# Altium PCB Oscilloscope.PcbDoc
Units mil, origin at the board's own origin, x right, y up, seen from the top; angles counter-clockwise.
Board outline 3550 x 3300 mil, 2 copper layers (Top Layer, Bottom Layer); 102 components, 111 nets, 421 pads, 62 vias.
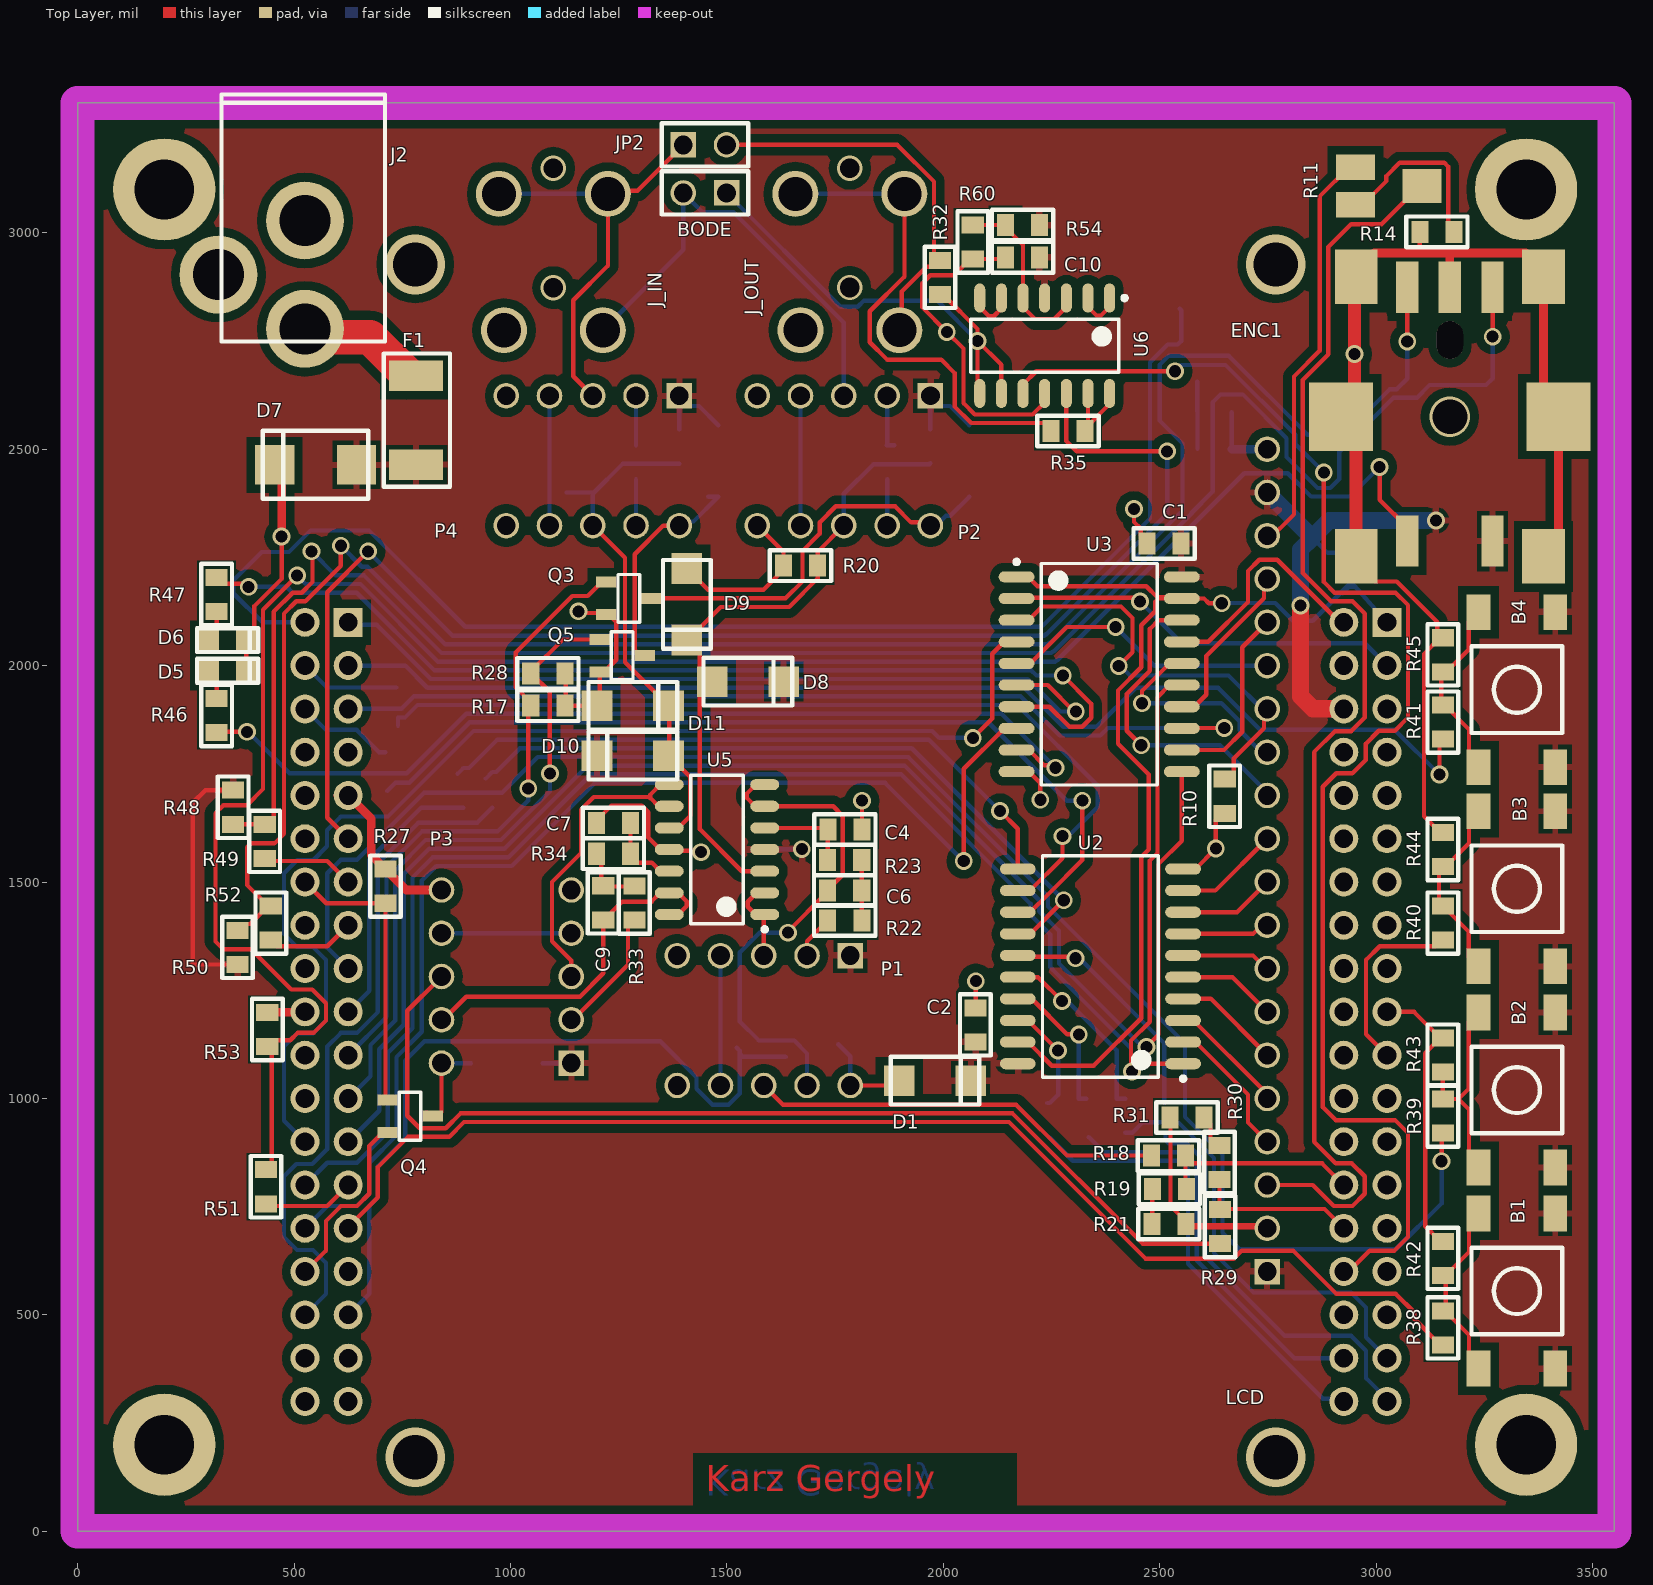
[diagram p0: Top Layer view]
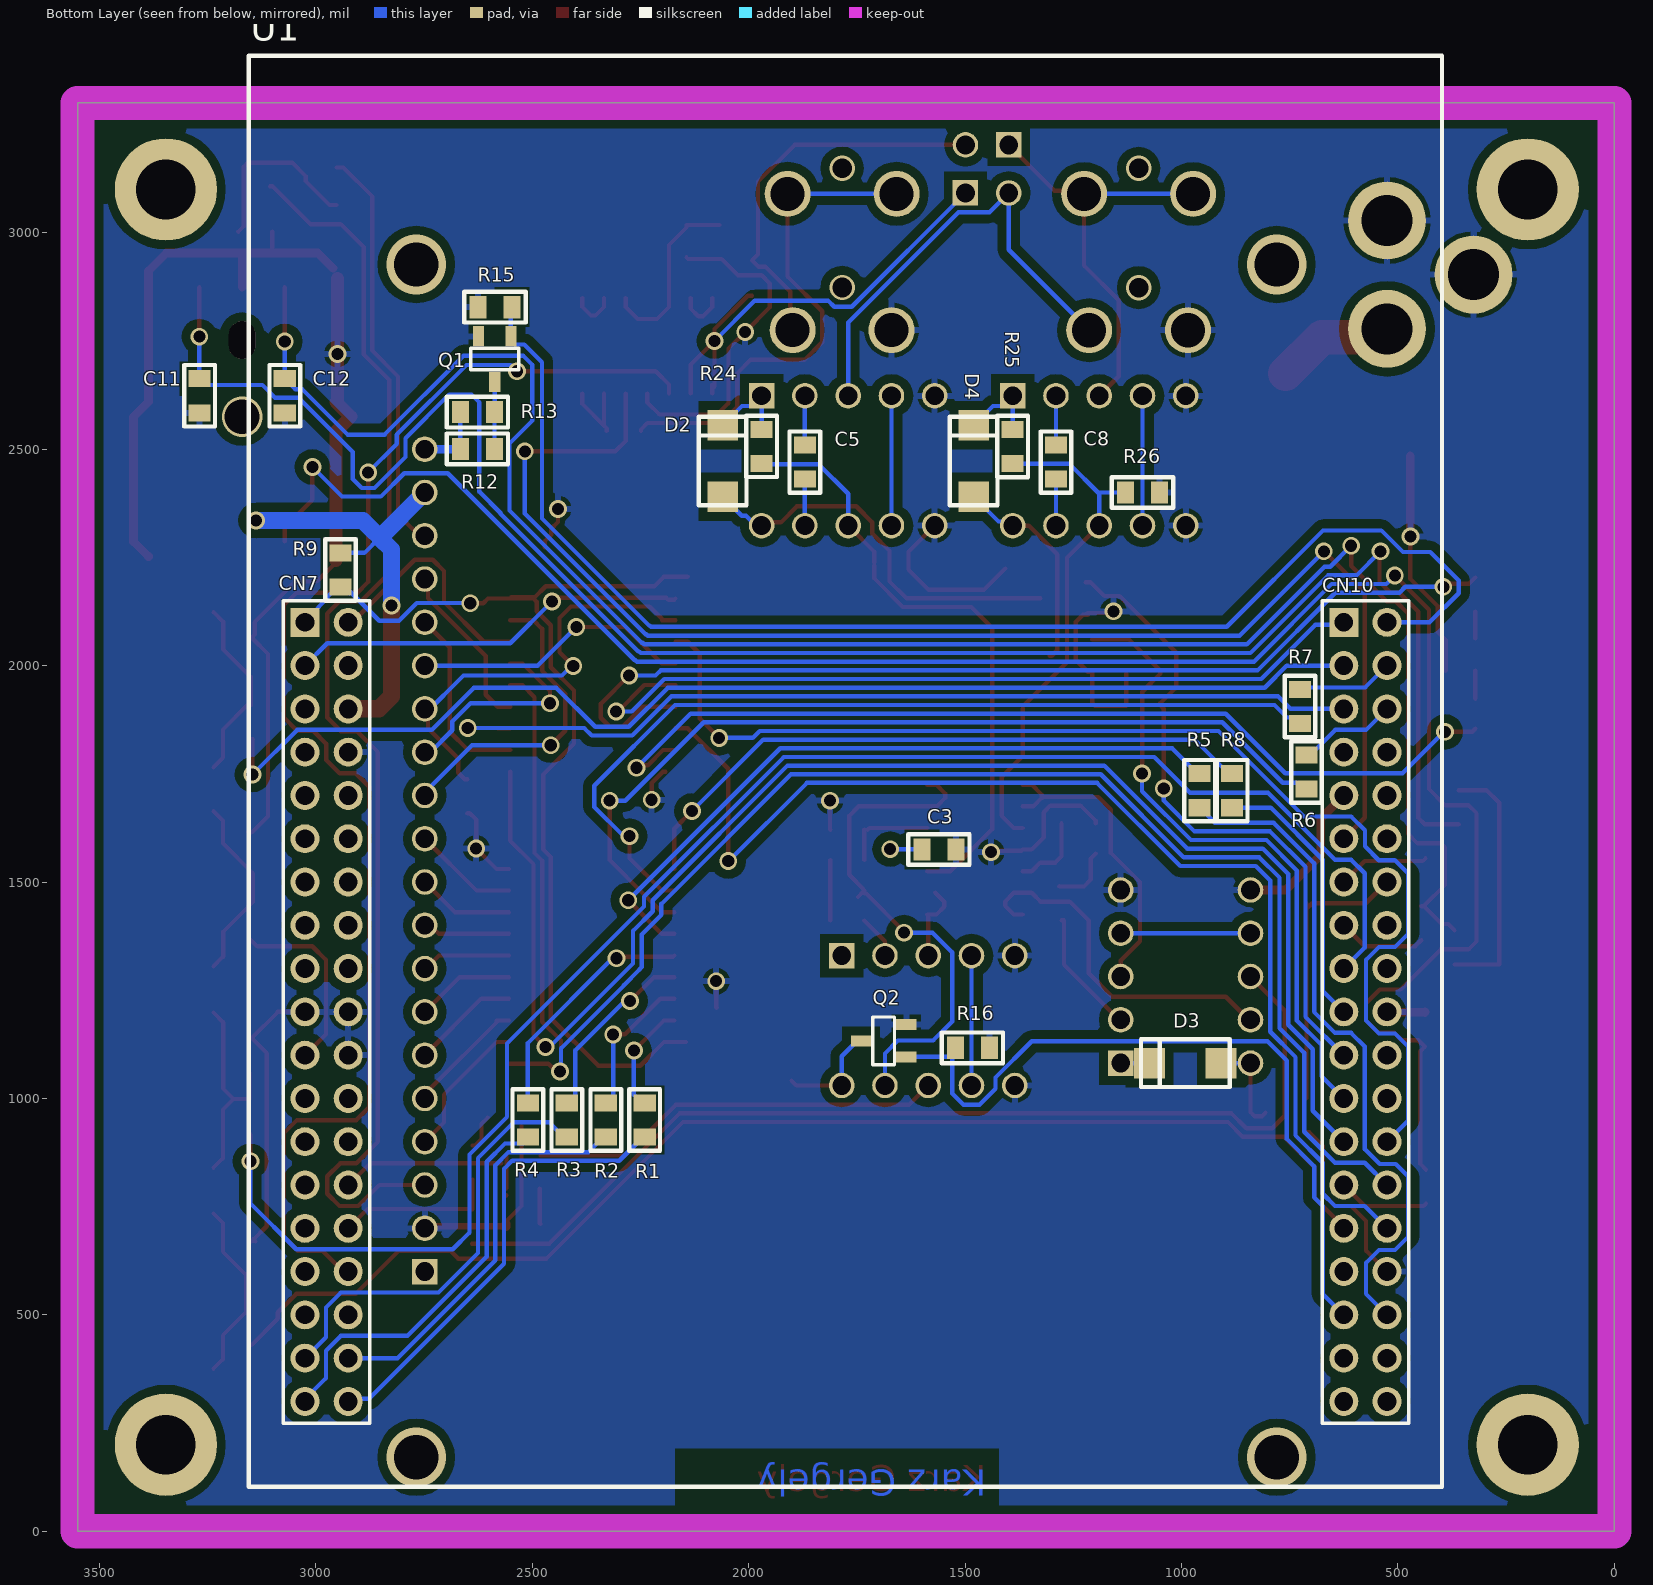
[diagram p1: Bottom Layer view, seen from below]
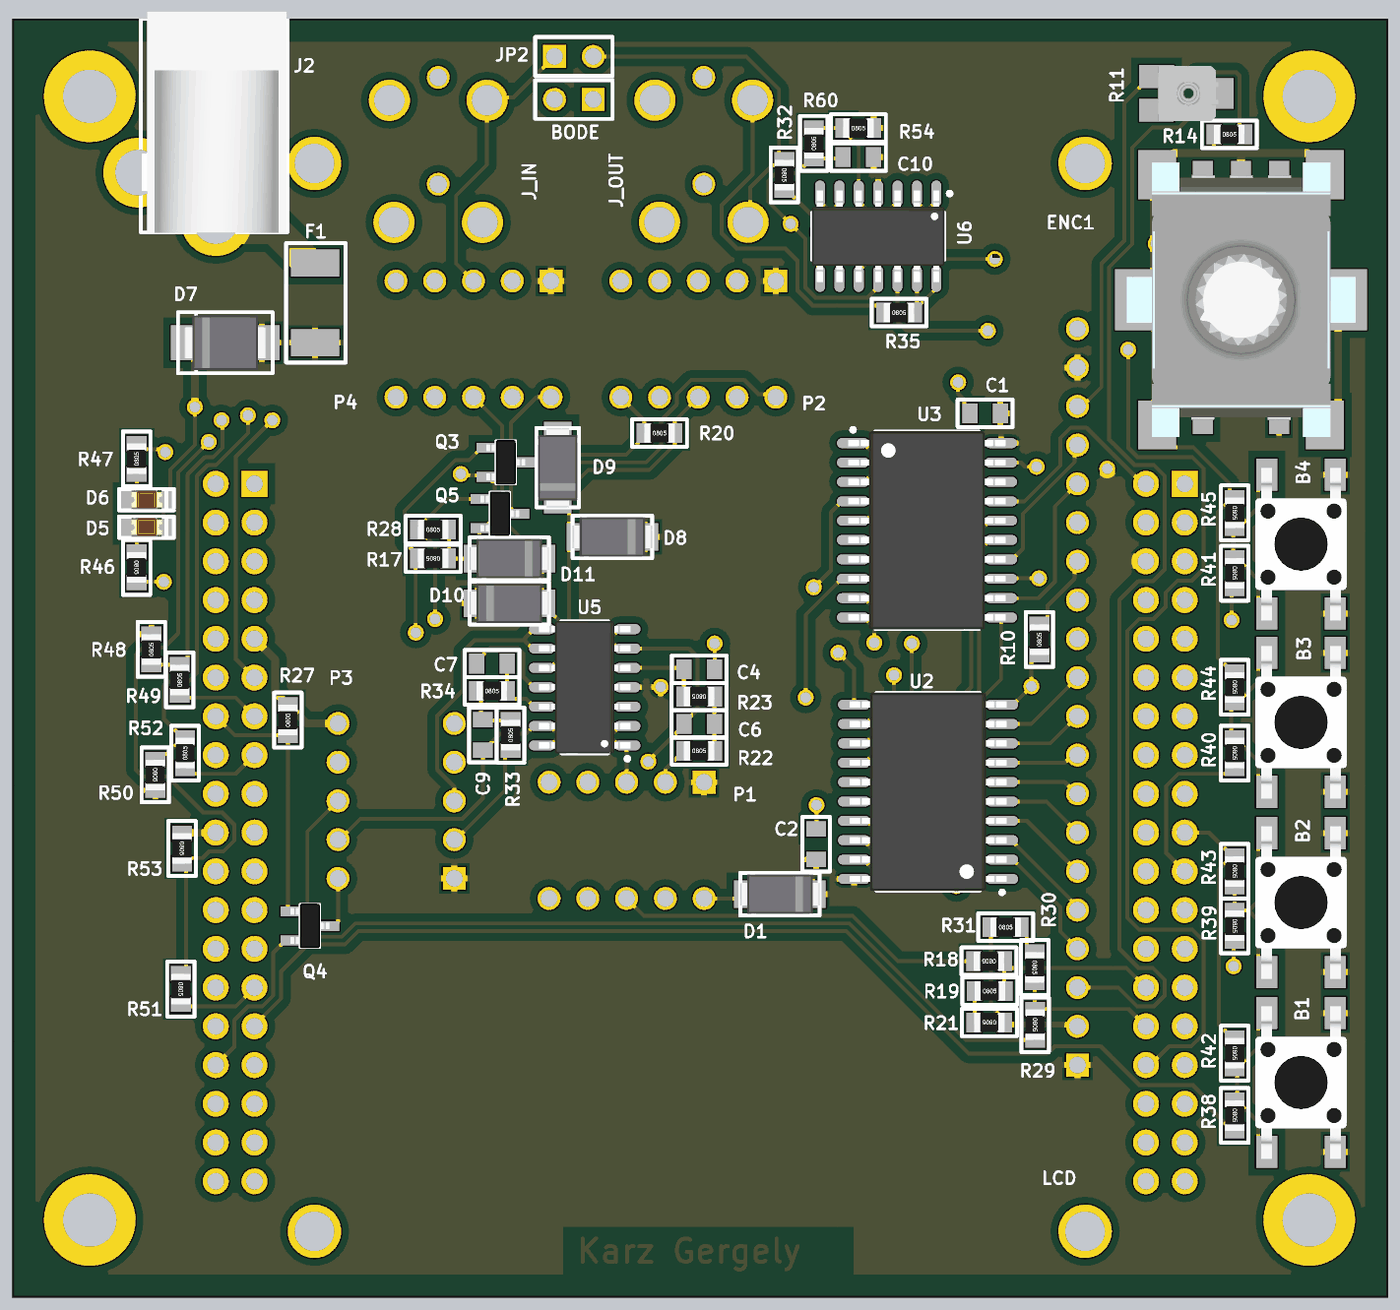
[diagram p2: 3D render of the assembled board from above, using the file's embedded part models]
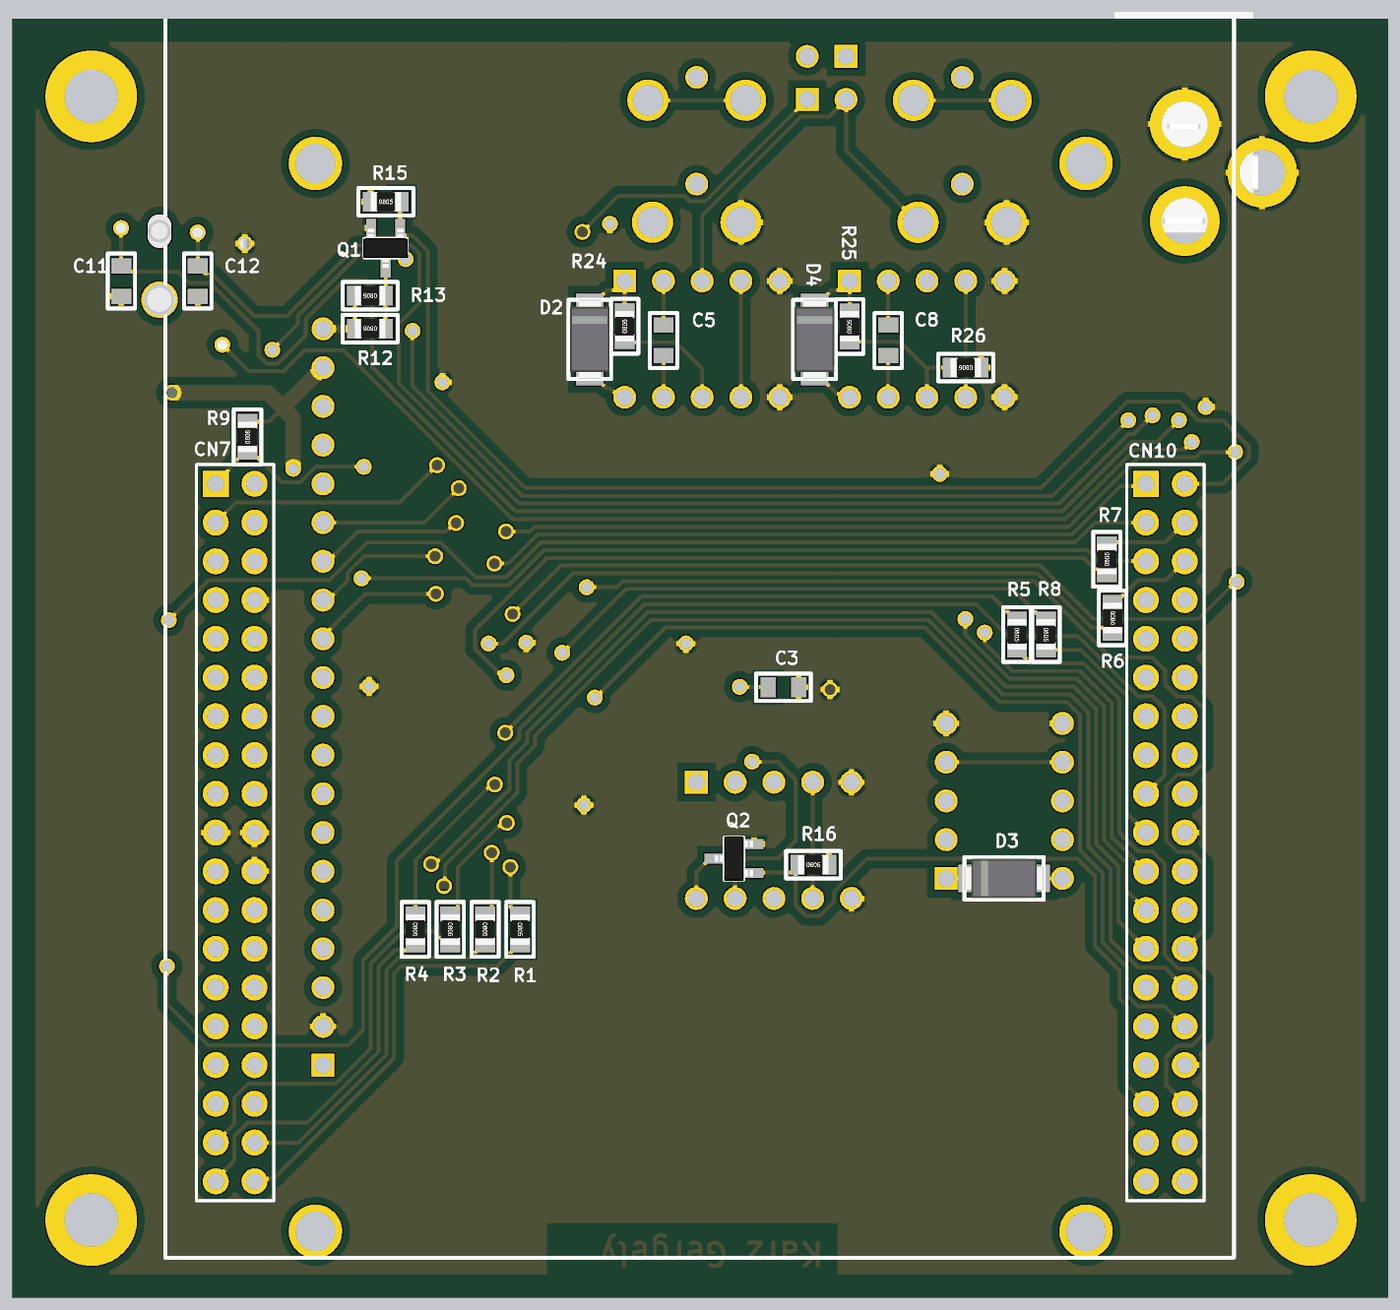
[diagram p3: 3D render of the assembled board from below, using the file's embedded part models]

## Layer stack, top to bottom
Top Solder: solder mask 0.4, Solder Resist, Dk 3.5
Top Layer: signal copper 1.4
Dielectric 1: dielectric 12.6, FR-4, Dk 4.8
Bottom Layer: signal copper 1.4
Bottom Solder: solder mask 0.4, Solder Resist, Dk 3.5

## Board outline
0,0 3550,0 3550,3300 0,3300

## Design rules (kind name [scope] priority, off if disabled: settings)
Clearance [All] p1: gap=20 ignorepadtopadclearanceinfootprint=FALSE except(0: Arc-Hole Track-Hole SMDPad-Hole THPad-Hole Via-Hole Fill-Hole Poly-Hole Region-Hole Text-Hole; 10: Arc-Arc Arc-Track Arc-SMDPad Arc-THPad Arc-Via Arc-Text Track-Track Track-SMDPad Track-THPad Track-Via Track-Text SMDPad-SMDPad SMDPad-THPad SMDPad-Via SMDPad-Text THPad-THPad THPad-Via THPad-Text Via-Via Via-Text Text-Text)
HoleSize [All] p1: absolutevalues=TRUE maxlimit=140 minlimit=28 maxpercent=80.000 minpercent=20.000
MinimumAnnularRing [IsVia] p1: minimumring=6.5
PlaneConnect [All] p1: planeconnectstyle=Relief reliefexpansion=20 reliefentries=4 reliefconductorwidth=20 reliefairgap=10
PolygonConnect [All] p1: connectstyle=Relief reliefconductorwidth=15 reliefentries=4 polygonreliefangle="90 Angle" airgapwidth=10
RoutingVias [All] p1: holewidth=28 width=41 viastyle="Through Hole" minholewidth=28 minwidth=41 maxholewidth=28 maxwidth=41
SolderMaskExpansion [All] p1: expansion=4
Width [All] p1: maxlimit=80 minlimit=10 preferedwidth=10 minimp=50.000000 maximp=50.000000 favimp=50.000000
28 further rules are at their usual default settings.

## Classes and differential pairs
net class LDB[0..7]: LDB0 LDB1 LDB2 LDB3 LDB4 LDB5 LDB6 LDB7
component class OutputStage: BODE C10 J_OUT JP2 R32 R35 R54 R60 U6
component class IO: B1 B2 B3 B4 C11 C12 D5 D6 ENC1 R38 R39 R40 R41 R42 R43 R44 R45 R46 R47 R48 R49 R50 R51 R52 R53
component class InputStage: C3 C4 C5 C6 C7 C8 C9 D1 D2 D3 D4 D8 D9 D10 D11 J_IN P1 P2 P3 P4 Q2 Q3 Q4 Q5 R16 R17 R18 R19 R20 R21 R22 R23 R24 R25 R26 R27 R28 R29 R30 R31 R33 R34 U5
component class GLCD: C1 C2 LCD Q1 R1 R2 R3 R4 R5 R6 R7 R8 R9 R10 R11 R12 R13 R14 R15 U2 U3
component class Nucleo: D7 F1 J2 U1

## Components (designator, comment, footprint, x,y, rotation, side; value= is the part's Value field where it differs from the comment)
B1 "Button" FP_BTN_SMD 3325,555 r180 top
B2 "Button" FP_BTN_SMD 3325,1019.37 r180 top
B3 "Button" FP_BTN_SMD 3325,1484.37 r180 top
B4 "Button" FP_BTN_SMD 3325,1944.37 r180 top
BODE "JUMPER" FP_CONN2_TUSKE_254MM 1499,3092 r90 top (schematic designator JP1)
C1 "100nF" FP_0805_CAP_085 2510,2282 r0 top
C2 "100nF" FP_0805_CAP_085 2073.85,1170 r270 top
C3 "100nF" FP_0805_CAP_085 1560.37,1575 r0 bottom
C4 "10nF" FP_0805_CAP_085 1772.37,1621 r180 top
C5 "10nF" FP_0805_CAP_085 1870,2470 r270 bottom
C6 "10nF" FP_0805_CAP_085 1772,1480.24 r180 top
C7 "10nF" FP_0805_CAP_085 1237.63,1636 r0 top
C8 "10nF" FP_0805_CAP_085 1290,2470 r270 bottom
C9 "10nF" FP_0805_CAP_085 1214,1452 r270 top
C10 "100nF" FP_0805_CAP_085 2183,2943.09 r0 top
C11 "10nF" FP_0805_CAP_085 3268.43,2623.43 r90 bottom
C12 "10nF" FP_0805_CAP_085 3071.57,2623.43 r90 bottom
D1 "SCHOTTKY SMA" FP_SMA 1898,1041 r0 top
D2 "SCHOTTKY SMA" FP_SMA 2060,2390 r90 bottom
D3 "SCHOTTKY SMA" FP_SMA 908.47,1081.68 r0 bottom
D4 "SCHOTTKY SMA" FP_SMA 1480,2390 r90 bottom
D5 "LED Green" FP_0805_LED_RED 306.94,1988 r0 top
D6 "LED Red" FP_0805_LED_RED 306.94,2059 r0 top
D7 "TRANS SUPPR" FP_SMB 549.51,2464 r180 top
D8 "SCHOTTKY SMA" FP_SMA 1465.65,1963 r0 top
D9 "SCHOTTKY SMA" FP_SMA 1407.29,2224.35 r270 top
D10 "SCHOTTKY SMA" FP_SMA 1365.08,1792.02 r180 top
D11 "SCHOTTKY SMA" FP_SMA 1199.72,1907.02 r0 top
ENC1 "Rotary Encoder" FP_PEC11S 3170,2575 r180 top locked
F1 "Multifuse" FP_MULTIFUSE 781.5,2670 r270 top
J2 "2.xmm" FP_DC_TAP_ANYA 525,2778.15 r0 top locked
J_IN "35mm Audio Jack 3 contact" FP_35MM_JACK_SMALL_3PIN 1099.02,3326 r270 top
J_OUT "35mm Audio Jack 3 contact" FP_35MM_JACK_SMALL_3PIN 1784.02,3326.22 r270 top locked
JP2 "JUMPER" FP_CONN2_TUSKE_254MM 1399,3203 r270 top
LCD "GLCD_64128Q" FP_GLCD_64128Q 760,72.44 r90 top locked (schematic designator U4)
P1 "Relay" FP_RELAY 1785,1330 r180 top
P2 "Relay" FP_RELAY 1970,2623.43 r180 top
P3 "Relay" FP_RELAY 1140.47,1081.68 r90 top
P4 "Relay" FP_RELAY 1390,2623.43 r180 top
Q1 "2N7002" FP_SOT23-3 2586.57,2708.23 r90 bottom
Q2 "2N7002" FP_SOT23-3 1688.01,1133 r180 bottom
Q3 "2N7002" FP_SOT23-3 1273.24,2155.4 r180 top
Q4 "2N7002" FP_SOT23-3 768,959 r180 top
Q5 "2N7002" FP_SOT23-3 1258,2023 r180 top
R1 "1K" FP_0805_RES 2240,950 r270 bottom
R2 "1K" FP_0805_RES 2330,950 r270 bottom
R3 "1K" FP_0805_RES 2420,950 r270 bottom
R4 "1K" FP_0805_RES 2510,950 r270 bottom
R5 "1K" FP_0805_RES 957.91,1711 r270 bottom
R6 "1K" FP_0805_RES 711,1754 r90 bottom
R7 "1K" FP_0805_RES 726,1905.32 r90 bottom
R8 "1K" FP_0805_RES 883,1711 r270 bottom
R9 "100K" FP_0805_RES 2943,2221 r90 bottom
R10 "10K" FP_0805_RES 2650,1698.19 r90 top
R11 "4K7" FP_CERMET_SMD 2968,3147 r270 top
R12 "100R" FP_0805_RES 2626.63,2500.63 r0 bottom
R13 "100R" FP_0805_RES 2626.63,2585.63 r0 bottom
R14 "6K8" FP_0805_RES 3140,3002 r0 top
R15 "10K" FP_0805_RES 2586,2828 r180 bottom
R16 "10K" FP_0805_RES 1483,1117 r180 bottom
R17 "10K" FP_0805_RES 1086,1907.63 r180 top
R18 "1K" FP_0805_RES 2520,868 r180 top
R19 "1K" FP_0805_RES 2522,791.03 r0 top
R20 "2M00" FP_0805_RES 1669.84,2231 r0 top
R21 "1K" FP_0805_RES 2521,710 r180 top
R22 "470R" FP_0805_RES 1772.13,1411 r0 top
R23 "470R" FP_0805_RES 1772,1551 r180 top
R24 "2M00" FP_0805_RES 1970,2506.63 r90 bottom
R25 "2M00" FP_0805_RES 1390,2506 r90 bottom
R26 "2M00" FP_0805_RES 1090,2400 r0 bottom
R27 "10K" FP_0805_RES 711,1490.37 r90 top
R28 "10K" FP_0805_RES 1086,1982 r0 top
R29 "1K" FP_0805_RES 2638.95,704 r270 top
R30 "1K" FP_0805_RES 2638,852 r270 top
R31 "1K" FP_0805_RES 2563,956 r0 top
R32 "47R" FP_0805_RES 1992,2897 r270 top
R33 "470R" FP_0805_RES 1286,1451.54 r90 top
R34 "470R" FP_0805_RES 1237.63,1565.46 r0 top
R35 "47R" FP_0805_RES 2288,2542 r0 top
R38 "1K" FP_0805_RES 3154,470 r270 top
R39 "1K" FP_0805_RES 3154,959.37 r270 top
R40 "1K" FP_0805_RES 3154,1405 r270 top
R41 "1K" FP_0805_RES 3154,1869.37 r270 top
R42 "10K" FP_0805_RES 3154,630.63 r270 top
R43 "10K" FP_0805_RES 3154,1100 r270 top
R44 "10K" FP_0805_RES 3154,1575 r270 top
R45 "10K" FP_0805_RES 3154,2025 r270 top
R46 "150R" FP_0805_RES 321,1884.37 r270 top
R47 "150R" FP_0805_RES 321,2164.37 r90 top
R48 "10K" FP_0805_RES 359,1672.74 r90 top
R49 "10K" FP_0805_RES 432,1594 r90 top
R50 "10K" FP_0805_RES 369,1349 r270 top
R51 "1K" FP_0805_RES 435,796 r270 top
R52 "10K" FP_0805_RES 446,1405 r90 top
R53 "10K" FP_0805_RES 438,1159.13 r270 top
R54 "10K" FP_0805_RES 2183,3018.09 r0 top
R60 "10K" FP_0805_RES 2068,2978.68 r90 top
U1 "NUCLEO-F446RE" FP_NUCLEO-64 3025,2100 r180 bottom locked
U2 "74HCT245" FP_SOP127P1030X265-20M 2362.76,1305.24 r180 top
U3 "74HCT244D" FP_SOP127P1030X265-20M 2360,1980 r0 top
U5 "TLV3544IDR" FP_SOIC127P600X175-14M 1477,1575 r180 top
U6 "TLV3544IDR" FP_SOIC127P600X175-14M 2234,2739 r270 top

## Footprints (in the part's own frame and the unit in brackets; to place one, negate y for a bottom-side part, rotate by r counter-clockwise, add the part's x,y. Pads: shape width x height; smd on the part's side, far side on the other; paste and mask are expansions set on the pad)
FP_35MM_JACK_SMALL_3PIN [mm] "MX-387GL -  Phone Audio Connector, 3 Contacts, Jack, 3.5 mm, PCB Mount, Metal Body"
  round 2.7 hole 2: 1(14,2.9) 2(6,3.2) 2(6,-3.2) 3(14,-2.9)
  body extent 0,-3.7 19.2,8.5, height 6
FP_0805_CAP_085 [mm] "0805 kapacitás YAGEO 0.85mm magas"
  rect 1x1.3 smd: 1(-1,0) 2(1,0)
  silkscreen extent -1.8,-0.9 1.8,0.9, body extent -1,-0.64 1.03,0.64, height 0.85
FP_0805_LED_RED [mm] "0805 méretû piros LED"
  rect 1.2x1.3 smd: A(-0.1,0) K(2.1,0)
  silkscreen extent -0.8,-0.7 2.8,0.7, body extent 0.01,-0.63 2.03,0.62, height 1.1
FP_0805_RES [mm] "0805 ellenállás"
  rect 1x1.3 smd: 1(-1,0) 2(1,0)
  silkscreen extent -1.8,-0.9 1.8,0.9, body extent -1,-0.62 1,0.63, height 0.62
FP_BTN_SMD [mm] "SMD Push Button 6x6mm"
  rect 1.4x2.1 smd: 1(2.25,4.55) 2(2.25,-4.55) 3(-2.25,4.55) 4(-2.25,-4.55)
  silkscreen extent -2.67,-2.54 2.67,2.54, body extent -3,-5 3,5, height 5.1
FP_CERMET_SMD [mm] "SMD Cermet Pot 3x3.8mm"
  rect 1.5x2.3 smd: 1(-0.1,-0.4) 3(2.1,-0.4)
  rect 2x2.3 smd: 2(1,3.5)
  body extent -0.8,-0.32 2.8,3.64, height 1.13
FP_CONN2_TUSKE_254MM [mm] "2×1 tüskesor"
  rect 1.5x1.5 hole 1.1: 1(0,0)
  round 1.5 hole 1.1: 2(0,2.54)
  silkscreen extent -1.27,-1.27 1.27,3.81, body extent -1.27,-1.27 1.27,3.81, height 8.54
FP_DC_TAP_ANYA [mil] "DC HEBA25 TÁPFESZÜLTSÉG ALJZAT ZÁRT, NYÁKBA 90°"
  round 180 hole 118: 1(0,0) 2(0,250) 3(-200,125)
  silkscreen extent -193,-30 185,541, body extent -190,-31 183,539, height 440
FP_GLCD_64128Q [mm] "64128Q"
  rect 1.5x1.5 hole 1.1: 1(13.4,-50.5)
  round 1.5 hole 1.1: 2(15.94,-50.5) 3(18.48,-50.5) 4(21.02,-50.5) 5(23.56,-50.5) 6(26.1,-50.5) 7(28.64,-50.5) 8(31.18,-50.5) 9(33.72,-50.5) 10(36.26,-50.5) 11(38.8,-50.5) 12(41.34,-50.5) 13(43.88,-50.5) 14(46.42,-50.5) 15(48.96,-50.5) 16(51.5,-50.5) 17(54.04,-50.5) 18(56.58,-50.5) 19(59.12,-50.5) 20(61.66,-50.5)
  body extent 0,-53 75,0.75, height 16.3
FP_MULTIFUSE [mm] "POLYFUSE SMD 1812"
  rect 1.78x3.15 smd: 1(0,0) 2(5.23,0)
  silkscreen extent -1.3,-1.9 6.53,2, body extent 0.3,-1.64 5,1.79, height 1
FP_NUCLEO-64 [mm]
  rect 1.7x1.7 hole 1.1: 1(0,0) 39(60.96,0)
  round 1.7 hole 1.1: 2(2.54,0) 3(0,-2.54) 4(2.54,-2.54) 5(0,-5.08) 6(2.54,-5.08) 7(0,-7.62) 8(2.54,-7.62) 9(0,-10.16) 10(2.54,-10.16) 11(0,-12.7) 12(2.54,-12.7) 13(0,-15.24) 14(2.54,-15.24) 15(0,-17.78) 16(2.54,-17.78) 17(0,-20.32) 18(2.54,-20.32) 19(0,-22.86) 20(2.54,-22.86) 21(0,-25.4) 22(2.54,-25.4) 23(0,-27.94) 24(2.54,-27.94) 25(0,-30.48) 26(2.54,-30.48) 27(0,-33.02) 28(2.54,-33.02) 29(0,-35.56) 30(2.54,-35.56) 31(0,-38.1) 32(2.54,-38.1) 33(0,-40.64) 34(2.54,-40.64) 35(0,-43.18) 36(2.54,-43.18) 37(0,-45.72) 38(2.54,-45.72) 40(63.5,0) 41(60.96,-2.54) 42(63.5,-2.54) 43(60.96,-5.08) 44(63.5,-5.08) 45(60.96,-7.62) 46(63.5,-7.62) 47(60.96,-10.16) 48(63.5,-10.16) 49(60.96,-12.7) 50(63.5,-12.7) 51(60.96,-15.24) 52(63.5,-15.24) 53(60.96,-17.78) 54(63.5,-17.78) 55(60.96,-20.32) 56(63.5,-20.32) 57(60.96,-22.86) 58(63.5,-22.86) 59(60.96,-25.4) 60(63.5,-25.4) 61(60.96,-27.94) 62(63.5,-27.94) 63(60.96,-30.48) 64(63.5,-30.48) 65(60.96,-33.02) 66(63.5,-33.02) 67(60.96,-35.56) 68(63.5,-35.56) 69(60.96,-38.1) 70(63.5,-38.1) 71(60.96,-40.64) 72(63.5,-40.64) 73(60.96,-43.18) 74(63.5,-43.18) 75(60.96,-45.72) 76(63.5,-45.72)
  silkscreen extent -3.3,-50.72 66.72,33.25, body extent -3.3,-50.72 66.72,33.25, height 11
FP_PEC11S [mm] "ENCODER EC11P20 (KEN) ROTARY ENCODER + PUSH BUTTON 20-PULSE L=15mm /EC-11/"
  rect 1.3x3 smd: A(-2.5,-7.6) B(2.5,-7.6) C(0,-7.6) D(-2.5,7.3) E(2.5,7.3)
  rect 3.75x4 smd: GND(-6.375,0) GND(6.375,0)
  rect 2.5x3.2 smd: GND(-5.5,8.2) GND(-5.5,-8.2) GND(5.5,8.2) GND(5.5,-8.2)
  oval 1.55x2.2 hole 2.2 slot 1.55 at 0 deg unplated: ""(0,-4.5)
  body extent -7.52,-9 19.2,9, height 14.4
FP_RELAY [mm] "Low Profile Mini Relay 14x9x5mm"
  rect 1.5x1.5 hole 1.1: 1(0,0)
  round 1.5 hole 1.1: 2(2.54,0) 3(5.08,0) 4(7.62,0) 5(10.16,0) 6(10.16,7.62) 7(7.62,7.62) 8(5.08,7.62) 9(2.54,7.62) 10(0,7.62)
  body extent -1.92,-0.69 12.1,8.3, height 5
FP_SMA [mm] "SMA DO-214AC tok"
  rect 1.8x1.8 smd: 1(0,0) 2(4.2,0)
  silkscreen extent -0.5,-1.4 4.7,1.4, body extent -0.5,-1.3 4.7,1.3, height 2.42
FP_SMB [mm] "DO214-AA tok (SMB)"
  rect 2.3x2.3 smd: 1(-2.4,0) 2(2.4,0)
  silkscreen extent -3.1,-2 3.1,2, body extent -2.7,-1.8 2.7,1.8, height 2.32
FP_SOIC127P600X175-14M [mm] "SOIC, 14-Leads, Body 8.65x3.90mm, Pitch 1.27mm, IPC Low Density"
  oval 1.7x0.65 smd: 1(-2.8,3.81) 2(-2.8,2.54) 3(-2.8,1.27) 4(-2.8,0) 5(-2.8,-1.27) 6(-2.8,-2.54) 7(-2.8,-3.81) 8(2.8,-3.81) 9(2.8,-2.54) 10(2.8,-1.27) 11(2.8,0) 12(2.8,1.27) 13(2.8,2.54) 14(2.8,3.81)
  silkscreen extent -2.93,-4.35 1.55,4.81, body extent -3,-4.35 3,4.35, height 1.75
FP_SOP127P1030X265-20M [mm] "SOP, 20-Leads, Body 12.80x7.50mm, Pitch 1.27mm, IPC Low Density"
  oval 2.1x0.65 smd: 1(-4.85,5.715) 2(-4.85,4.445) 3(-4.85,3.175) 4(-4.85,1.905) 5(-4.85,0.635) 6(-4.85,-0.635) 7(-4.85,-1.905) 8(-4.85,-3.175) 9(-4.85,-4.445) 10(-4.85,-5.715) 11(4.85,-5.715) 12(4.85,-4.445) 13(4.85,-3.175) 14(4.85,-1.905) 15(4.85,-0.635) 16(4.85,0.635) 17(4.85,1.905) 18(4.85,3.175) 19(4.85,4.445) 20(4.85,5.715)
  silkscreen extent -4.98,-6.5 3.4,6.71, body extent -5.15,-6.5 5.15,6.5, height 2.65
FP_SOT23-3 [mm] "SOT23-3 tok"
  rect 1.2x0.65 smd: 1(1.327,-0.95) 2(1.327,0.95) 3(-1.327,0)
  silkscreen extent -0.64,-1.4 0.64,1.4, body extent -1.27,-1.46 1.27,1.46, height 0.97

## Part data
B1 B2 B3 B4: "Push button", Name="TACT 6x 6 4P SPST 1 FSM2JSMA (TYC) 50mA 12VDC SMD H=4.3mm 160g BLACK B. 2-1437565-7", Reference=45-05-42, Supplier=Lomex
BODE JP2: "Jumper Wire"
C1 C2 C3 C10: library part "CAP 100nF", "Capacitor", Tolerance=10%, Voltage=50V, Name="100nF 0805 10% 50V X7R 0805B104K500CT (WAL)", Reference=82-10-76, Supplier=Lomex
C4 C5 C6 C7 C8 C9 C11 C12: library part "CAP 10nF", "Capacitor", Tolerance=10%, Voltage=100V, Name="10nF 0805 10% 100V X7R 08051C103KAT2A (AVX)", Reference=82-11-02, Supplier=Lomex
D1 D2 D3 D4 D8 D9 D10 D11: "Schottky diode", Current=1A, Voltage=40V, Name="1A 40V DO-214AC SCH.RECT.LOW Vf SSL14 (TSC) SMA", Reference=83-02-20, Supplier=Lomex
D5: "Green LED", I_max=25mA, Name="2012 GREEN 568nm 15mcd KP-2012SGC (KIN) W.CLEAR 2x1.2x1.1mm 0805 120°", Reference=95-01-09, Supplier=Lomex, U_fw=2.2V, Wavelength=568nm
D6: "Red LED", I_max=30mA, Name="2012 RED 640nm 100mcd KP-2012SRC-PRV (KIN) W.CLEAR 2x1.2x1.1mm 0805 120°", Reference=95-01-68, Supplier=Lomex, U_fw=1.85V, Wavelength=640nm
D7: "Transient suppressor", Voltage=6.7V, Name="6.7V Ubr 600W UNIDIR. 5V Urwm SMBJ5.0A (STM) DO-214AA (SMB) ½BUZ½", Reference=96-03-67, Supplier=Lomex
ENC1: library part PEC11S-929K, "Encoders 9.5 MM SHAFT W/SWITCH 2 DET", Name=PEC11S-929K-H0015
F1: "1812 Multifuse", Name="1.25A 15V 1812L125/16DR POLYFUSE SMD 1812 (LFS) ½LF125-16½", Reference=44-04-71, Supplier=Lomex
J2: library part DC_TAP_ANYA, "2.xmm DC HEBA25 TÁPFESZÜLTSÉG ALJZAT ZÁRT, NYÁKBA 90°", Name="TÁP DC ANYA 5.5/2.1/9.5mm DCS-5521-5", Reference=43-07-67, Supplier=Lomex
J_IN J_OUT: "3.5mm Audio Jack MX-387GL", Name="MX-387GL -  Phone Audio Connector, 3 Contacts, Jack, 3.5 mm, PCB Mount, Metal Body", Reference=1267376, Supplier=Farnell
LCD: "64128QCCBW-3LP", Name="128x 64 DOT LIGHT:LED 64128QCCBW-3LP (DIS) 0.4/DOT 75x53mm BLUE STN LOW.POW. WIDE TEMP. (CONTROLLER/DRIVER: SBN6400G-D + SBN0064G-D)", Reference=37-00-71, Supplier=Lomex
P1 P2 P3 P4: library part "Relay Mini DPDT", "Mini DPDT relay 14x9x5mm", Name="MECH 5V 2xMORSE 1A/30VDC 0.5A/12VAC A5W-K (TAK) 178R 14x9x5mm", Reference=42-17-08, Supplier=Lomex
Q1 Q2 Q3 Q4 Q5: "N-channel MOSFET", Current=300mA, Voltage=60V, Name="MOSFET Transistor, N Channel, 300mA, 60V, 2.8 ohm, 10V, 2V", Reference=86-05-52, Supplier=Lomex
R1 R2 R3 R4 R5 R6 R7 R8 R18 R19 R21 R29 R30 R31 R38 R39 R40 R41 R51: library part "RES 1K", "Resistor", Power=125mW, Tolerance=5%, Name="1K00 0805 5% WR08X102JTL 0.125W (WAL)", Reference=81-27-93, Supplier=Lomex
R9: library part "RES 100K", "Resistor", Power=125mW, Tolerance=5%, Name="100K 0805 5% WR08X104JTL 0.125W (WAL)", Reference=81-30-68, Supplier=Lomex
R10 R15 R16 R17 R27 R28 R42 R43 R44 R45 R48 R49 R50 R52 R53 R54 R60: library part "RES 10K", "Resistor", Power=125mW, Tolerance=5%, Name="10K0 0805 5% CR-05JL7---10K 0.125W (VIK)", Reference=81-30-45, Supplier=Lomex
R11: library part "Cermet Pot 4K7", "4K70 3305-472R (KIC) 3x3.8mm CERMET", Name="4K70 3305-472R (KIC) 3x3.8mm CERMET", Reference=90-00-68, Supplier=Lomex
R12 R13: library part "RES 100R", "Resistor", Power=125mW, Tolerance=5%, Name="100R 0805 5% WR08X101JTL 0.125W (WAL)", Reference=81-30-00, Supplier=Lomex
R14: library part "RES 6K8", "Resistor", Power=125mW, Tolerance=5%, Name="6K80 0805 5% WR08X682JTL 0.125W (WAL)", Reference=81-30-41, Supplier=Lomex
R20 R24 R25 R26: library part "RES 2M", "Resistor", Power=125mW, Tolerance=1%, Name="2M00 0805 1% CR-05FL7---2M0 0.125W (VIK)", Reference=80-17-98, Supplier=Lomex
R22 R23 R33 R34: library part "RES 470R", "Resistor", Power=125mW, Tolerance=5%, Name="470R 0805 5% CR-05JL7--470R 0.125W (VIK)", Reference=81-10-83, Supplier=Lomex
R32 R35: library part "RES 47R", "Resistor", Power=125mW, Tolerance=5%, Name="47R0 0805 5% WR08X470JTL 0.125W (WAL)", Reference=81-28-06, Supplier=Lomex
R46 R47: library part "RES 150R", "Resistor", Power=125mW, Tolerance=5%, Name="150R 0805 5% CR-05JL7--150R 0.125W (VIK)", Reference=81-10-77, Supplier=Lomex
U2: "8x Bidirectional bus transciever", Name="74HCT245D  Transceiver, 74HCT245", Reference=87-06-35, Supplier=Lomex
U3: "8xBuffer/Line Driver", Name="74HCT244D-Q100,118  Buffer / Line Driver, 74HCT244", Reference=87-05-95, Supplier=Lomex
U5 U6: "Operational Amplifier, RRIO, 4 Amplifier, 200 MHz, 150 V/µs, 2.5V to 5.5V, ± 1.25V to ± 2.75V, SOIC", Name="TLV3544IDR . -  Operational Amplifier", Reference=2851094, Supplier=Farnell
U1: Name="Nucleo F446RE", Reference=NUCLEO, Supplier=Tanszék

## Free pads (board coordinates)
  round 236.22 hole 137.8: ""(200,200) ""(200,3100) ""(3346.26,200) ""(3346.26,3100)

## Via types
v1: diameter 41, hole 28, Top Layer to Bottom Layer, 53 vias
v2: diameter 58.66, hole 45.28, Top Layer to Bottom Layer, 4 vias
v3: diameter 137.8, hole 102.36, Top Layer to Bottom Layer, 4 vias
v4: diameter 94.09, hole 80.71, Top Layer to Bottom Layer, 1 vias

## Nets (pads, with @x,y where several pads share a name; then routed paths per layer and width w, separated by ;. In a path a pad name is that pad's centre, name@x,y a point inside that pad or via, vN(x,y) a via of type N, cw(c..) or ccw(c..) an arc to the next point about the centre after c; other vN are vias at no path point)
+5: B1.3 B1.4 B2.3 B2.4 B3.3 B3.4 B4.3 B4.4 C1.2 C2.2 C3.2 C10.2 D1.2 D2.2 D3.2 D4.2 D7.1 D8.2 D10.2 ENC1.D F1.2 LCD.1 LCD.19 P1.1 P2.1 P3.1 P4.1 R9.2 R24.2 R25.2 R48.2 R50.2 R54.2 U1.6 U2.20 U3.20 U5.4 U6.4 | length 2147.3
  Top Layer w10: R48.2 295.11,1712.11 266,1683 266,1309.63 R50.2
  Top Layer w40: v1(2825,2139) 2825,1929 2854,1900 U1.6
  Bottom Layer w10: D3.2 P3.1 ; R25.2 P4.1 1413.5,2599.93 1435.42,2599.93 D4.2 ; C3.2 1600.74,1574 1602.74,1576 v1(1673,1576) ; R24.2 P2.1 1993.5,2599.93 2015.42,2599.93 D2.2 ; 2852.33,2295.67 2887.63,2260.37 R9.2
  Bottom Layer w20: LCD.19@2747.69,2400.5 LCD.19
  Bottom Layer w40: LCD.19@2747,2401 2852.33,2295.67 2825,2268.34 v1(2825,2139) ; 2862.14,2306.3 2891.17,2335.32 v1(3138,2335.32)
A_IN1: R18.1 R19.2 U1.28 | length 454.1
  Top Layer w10: R18.1 2559.37,793.03 R19.2 ; R19.2@2559.74,776.63 R19.2@2561.37,775 ; R18.1@2571.74,850 2875,850 U1.28
A_IN2: R29.1 R30.2 U1.30 | length 374.6
  Top Layer w10: R30.2 2638,744.32 R29.1 2640.11,744.53 2880.47,744.53 U1.30
BTN_1: R38.2 U1.67 | length 2915.3
  Top Layer w10: U1.67 621.82,700 693.46,771.64 693.46,841.68 762.99,911.2 858.36,911.2 892.63,945.47 2151.38,945.47 2466.91,629.94 2670.76,629.94 2689.28,648.46 2808,648.46 2908,548.46 3045.07,548.46 3087.71,505.83 3087.71,491.02 3148.09,430.63 R38.2
BTN_2: R39.2 U1.55 | length 3823.6
  Top Layer w10: v1(3151,855) 3151,917 R39.2
  Bottom Layer w10: U1.55 576.54,1348.46 576.54,1478.7 577.15,1479.31 576.54,1479.93 576.54,1520.07 608,1551.54 645.07,1551.54 799.85,1706.32 980.35,1706.32 1063.03,1789 1918.55,1789 2241.5,1466.05 2241.5,1443.5 2558,1127 2558,957.4 2645,870.4 2645,690 2683.46,651.54 3045.07,651.54 3151,757.46 v1(3151,855)
BTN_3: R40.2 U1.21 | length 438.3
  Top Layer w10: U1.21 2976.54,1148.46 2976.54,1320.07 3008,1351.54 3135.54,1351.54 R40.2@3154,1370
BTN_4: R41.2 U1.41 | length 2787.1
  Top Layer w10: v1(3146,1748.18) 3146,1829 3145,1830 R41.2@3150,1830
  Bottom Layer w10: U1.41 756.57,2000 807.57,1949 2186.56,1949 2277.06,1858.5 2354.3,1858.5 2444.3,1948.5 2634.99,1948.5 2731.95,1851.54 3042.64,1851.54 v1(3146,1748.18)
BTN_MAIN: R51.2 U1.65 | length 212.2
  Top Layer w10: R51.2 440.09,751.54 576.54,751.54 U1.65
DAC_OUT1: U1.32 U6.10 | length 3247.5
  Top Layer w10: U6.10 2184,2649.43 2214.57,2680 v1(2535,2680) ; v1(2879,2446) 2879,2193.21 2903.75,2168.46 3044.68,2168.46 3073.46,2139.68 3073.46,1879.93 3043.06,1849.52 3005.98,1849.52 2975.57,1819.11 2975.57,1782.03 2944.88,1751.34 2907.8,1751.34 2876.54,1720.07 2876.54,979.93 2906.46,950 3043.54,950 3073.46,920.07 3073.46,679.93 3042,648.46 2985.07,648.46 2936.61,600 U1.32
  Bottom Layer w10: v1(2535,2680) 2549.6,2694.6 2651.8,2694.6 2812.72,2533.69 2812.72,2512.28 v1(2879,2446)
DAC_OUT2: U1.49 U6.12 | length 3263.4
  Top Layer w10: U1.49 576.54,1648.46 576.54,2169.54 v1(671,2264) ; U6.12 2284,2518.88 2307.88,2495 v1(2517,2495)
  Bottom Layer w10: v1(671,2264) 866,2069 2232.94,2069 2236.44,2072.5 2238.28,2072.5 2517,2351.22 v1(2517,2495)
GLCD_BACKLIGHT_PWM: Q1.1 R15.2 U1.40 | length 3113
  Bottom Layer w10: U1.40 426.8,2100 359.5,2167.3 359.5,2196.7 425.3,2262.5 488.3,2262.5 538.09,2312.3 672.91,2312.3 895.3,2089.9 2225.56,2089.9 2228.16,2092.5 2230,2092.5 2477.42,2339.92 2477.42,2700.91 2518.36,2741.85 2541.38,2741.85 2549.17,2749.64 Q1.1 2549.17,2821.27 R15.2@2546.22,2824.23
GLCD_CS1: U1.3 U3.2 | length 923.9
  Top Layer w10: U3.2 2172.04,2152.02 2185.52,2152.02 2190,2156.5 2445.5,2156.5 v1(2454,2148)
  Bottom Layer w10: v1(2454,2148) 2550.46,2051.54 2973.46,2051.54 U1.3
GLCD_CS2: U1.64 U3.4 | length 2800.5
  Top Layer w10: v1(2068,1833) 2112.72,1877.72 2112.72,2027.2 2140.51,2055 U3.4
  Bottom Layer w10: U1.64 476.54,948.46 476.54,1120.07 506.46,1150 543.54,1150 573.46,1179.93 573.46,1320.07 543.54,1350 506.46,1350 476.54,1379.93 476.54,1520.07 506.96,1550.5 544.04,1550.5 576.02,1582.48 576.02,1619.56 608,1651.54 716.79,1651.54 914.26,1849 1974.28,1849 1990.28,1833 v1(2068,1833)
GLCD_DB0: R1.2 U1.38 | length 1059.8
  Bottom Layer w10: R1.2@2245.91,909.09 2299.06,855.94 2546.32,855.94 2565,837.27 2565,618.07 2876.54,306.53 2918.47,306.53 U1.38
GLCD_DB1: R2.2 U1.36 | length 929.3
  Bottom Layer w10: R2.2@2335.91,910.63 2362.98,883.55 2362.98,883.02 2370.06,875.94 2554.61,875.94 2585,845.55 2585,626.35 2811.35,400 U1.36
GLCD_DB2: R3.2 U1.35 | length 1009.7
  Bottom Layer w10: R3.2@2420,920.63 2436.63,920.63 2461.32,945.32 2541.8,945.32 2625,862.12 2625,642.92 2716.38,551.54 2942,551.54 2976.54,517 2976.54,448.46 U1.35
GLCD_DB3: R4.2 U1.37 | length 945
  Bottom Layer w10: R4.2@2512.95,917.68 2512.95,903.05 2520.06,895.94 2562.89,895.94 2605,853.83 2605,634.64 2788.1,451.54 2942,451.54 2976.54,417 2976.54,353.93 3025,305.47 U1.37
GLCD_DB4: R5.2 U1.72 | length 1576.1
  Bottom Layer w10: U1.72 573.46,548.46 573.46,620.07 543.54,650 506.46,650 476.54,679.93 476.54,820.07 504.93,848.46 542,848.46 576.54,883 576.54,1120.07 608,1151.54 645.07,1151.54 693.46,1199.93 693.46,1543.36 787.05,1636.94 922.8,1636.94 R5.2@957.7,1671.84
GLCD_DB5: R6.2 U1.44 | length 227.1
  Bottom Layer w10: U1.44 573.46,1851.54 644.6,1851.54 696.13,1800 R6.2@710.63,1800
GLCD_DB6: R7.2 U1.42 | length 232
  Bottom Layer w10: U1.42 575.63,1949.37 R7.2@736,1949.37
GLCD_DB7: R8.2 U1.57 | length 639
  Bottom Layer w10: U1.57 673.46,1248.46 673.46,1551.64 793.45,1671.63 R8.2@891,1671.63
GLCD_DI: U1.68 U3.8 | length 2749.6
  Top Layer w10: v1(2047,1548.39) 2047,1761.49 2140.51,1855 U3.8
  Bottom Layer w10: U1.68 576.54,751.54 645.07,751.54 673.46,779.93 673.46,851.64 736.48,914.65 736.48,1095.48 795,1154 795,1503.47 828.47,1536.94 1002.85,1536.94 1194.91,1729 1865.36,1729 2045.97,1548.39 v1(2047,1548.39)
GLCD_E: U1.39 U3.6 | length 1928.5
  Top Layer w10: U3.6 2241.03,1955 2302.03,1894 v1(2306,1894)
  Bottom Layer w10: U1.39 630.86,2094.14 690.72,2094.14 815.86,1969 2194.84,1969 2269.84,1894 v1(2306,1894)
GLCD_EN: R9.1 U1.1 U2.19 U3.1 U3.19 | length 2532.4
  Top Layer w10: U3.1@2140.51,2205 U3.1 2196,2205 2217.5,2183.5 2468.74,2183.5 2494.64,2157.6 2548.35,2157.6 U3.19 ; U2.19@2144.76,1130.24 U2.19 2195.56,1130.24 2250.3,1075.5 2347.01,1075.5 2457,1185.49 2457,1557.96 2474.5,1575.46 2474.5,1748.3 2403.5,1819.3 2403.5,1942.67 2457,1996.17 2457,2093.05 2489.5,2125.55 2489.5,2147.26 2497.24,2155 U3.19 ; v1@2632,2155 v1(2643,2144) 2613,2144 2602,2155 U3.19
  Bottom Layer w10: v1(2643,2144) 2643.53,2144.53 2766.63,2144.53 2807.66,2103.5 2853.5,2103.5 2942.36,2192.36 2947.98,2186.08 U1.1 ; R9.1@2922.41,2166.95 2937.09,2181.63 R9.1@2948.91,2181.63
GLCD_RST: U1.2 U3.17 | length 554.4
  Top Layer w10: U3.17 2611.93,2055 2703.66,2146.73 2703.66,2218.44 2729.75,2244.53 2771.12,2244.53 2915.64,2100 U1.2
GLCD_RW: U1.66 U2.1 U3.15 | length 4073.6
  Top Layer w10: U3.15 2522.4,1955 2494.5,1927.1 2494.5,1567.17 2477,1549.67 2477,1177.2 2433.5,1133.7 2433.5,1064.5 v1(2436,1062) 2444.39,1062 2462.62,1080.24 U2.1
  Bottom Layer w10: U1.66 576.54,851.54 645.07,851.54 716.48,922.94 716.48,1105.19 773.46,1162.18 773.46,1510.22 820.19,1556.94 994.57,1556.94 1186.62,1749 1901.99,1749 2201.5,1449.49 2201.5,1424.29 2247,1378.79 2247,1303.51 2253,1297.51 2253,1296.72 2288.09,1261.62 2288.09,1261.11 2433.5,1115.7 2433.5,1064.5 v1(2436,1062)
GND: C1.1 C2.1 C3.1 C4.1 C7.1 C10.1 C11.1 C12.1 D5.K D6.K D7.2 D9.1 D11.1 ENC1.C ENC1.GND J2.2 J2.3 J_IN.3 J_OUT.3 LCD.2 P1.5 P1.6 P2.5 P2.6 P3.5 P3.6 P4.5 P4.6 Q1.2 Q2.2 Q3.2 Q4.2 Q5.2 R10.1 R14.1 R15.1 R16.2 R17.1 R20.1 R21.1 R26.1 R27.2 R28.2 R31.1 R42.1 R43.1 R44.1 R45.1 R53.1 R60.1 U1.8 U1.19 U1.20 U1.22 U1.47 U1.58 U1.70 U2.10 U3.10 U5.11 U6.11 | length 7735
  Top Layer w10: D5.K D6.K 408.24,2077.62 408.24,2137.52 471.07,2200.36 v1(471.07,2298) ; U1.70 573.46,648.46 573.46,717 608,751.54 645.07,751.54 673.46,779.93 673.46,890.13 704.93,921.6 Q4.2 ; R28.2@1127.37,1982 1127.37,1907.63 1127.98,1907.02 D11.1 1205.76,1913.06 Q5.2 1216.58,1985.6 1244.38,2013.39 1244.38,2100.8 1227.58,2117.6 Q3.2@1216.76,2117.6 ; v1(1157.15,2125.4) 1160.85,2121.7 1217.3,2121.7 Q3.2 ; C7.1 1198.26,1641.91 1232.94,1676.59 1302.9,1676.59 1318.3,1661.19 1318.3,1602.8 1346.09,1575 U5.11 1369.75,1572.02 1436.98,1572.02 v1(1440,1569) ; D9.1 1456.24,2175.4 1584.4,2175.4 1630.47,2221.47 R20.1 1630.47,2262.95 P2.6 ; C4.1 1812,1621.26 v1(1812,1688) ; C2.1 2075,1210.52 v1(2075,1271) ; C10.1 2139.85,2939.31 R60.1 2062.09,2939.31 2024.46,2901.68 1969.57,2901.68 1951.41,2883.53 1951.41,2827.59 v1(2008,2771) 2008,2770.8 2046.29,2732.5 2046.29,2606.49 2072.49,2580.3 2206.2,2580.3 2234,2608.09 U6.11 ; U3.10@2191.98,1755 2197.6,1755 2224,1728.6 v1(2224,1690) ; v1(2440.33,2362) 2440.33,2331.69 2455.94,2316.07 2455.94,2302.59 2470.63,2287.91 C1.1 C1.1@2470.63,2273.47 ; R31.1@2524.68,936.43 2524.68,751.59 2560.37,715.91 R21.1 ; U2.10 2582.24,1530.24 v1(2629.41,1577.4) 2629.41,1644.13 2644.09,1658.82 R10.1 ; ENC1.GND@2953.46,2242.54 2953.46,2238.39 2997.68,2194.17 3047.25,2194.17 3140.91,2100.52 3140.91,2071.56 R45.1@3148.09,2064.37 ; U1.19 3087.46,1200 R43.1@3148.09,1139.37 ; 3100,2953.27 3100.63,2953.9 R14.1 ; R42.1@3140,670 R42.1@3144.05,674.05 ; R42.1@3144.87,674.87 R42.1@3144.05,674.05 ; R42.1 3148.09,670 R42.1@3144.05,674.05 ; R43.1 R43.1@3148.09,1139.37 ; R45.1 R45.1@3148.09,2064.37 ; R44.1@3155,1615.37 R44.1 3148.09,1614.37 3110.5,1651.96 3110.5,2026.78 R45.1@3148.09,2064.37 ; 3168,2955.27 3170,2953.27 ; R42.1@3144.05,674.05 3113.41,704.69 3113.41,1104.68 R43.1@3148.09,1139.37
  Top Layer w15: R21.1@2565.37,705 LCD.2@2743.19,705
  Top Layer w20: R53.1@436.5,1200 R53.1 438.75,1199.25 524.25,1199.25 U1.58 ; v1(471.07,2298) D7.2@471.07,2484.93 ; U1.47@601.54,1700 U1.47 678.46,1646.54 678.46,1562.28 R27.2 759.06,1481.68 P3.6 ; R21.1@2560.37,704.09 R21.1 R21.1@2565.37,705 ; LCD.2@2743.19,705 LCD.2 ; ENC1.GND@2960,2918.15 2995.12,2953.27 3100,2953.27 3170,2953.27 ; ENC1.C 3170,2953.27 ; ENC1.GND@3386.54,2252.17 3420.98,2286.61 3420.98,2575 3386.54,2609.45 3386.54,2911.62 3344.88,2953.27 3170,2953.27
  Top Layer w30: ENC1.GND@2950,2894.37 v1(2950,2720) 2950,2612.91 2953.46,2609.45 2919.02,2575 2953.46,2540.55 ENC1.GND@2953.46,2242.54
IN1: BODE.2 J_IN.1 P2.3 | length 1058.4
  Bottom Layer w10: J_IN.1 1399,2960.63 BODE.2 1443.53,3047.47 1515.24,3047.47 1770,2792.72 P2.3
IN1_AA: Q2.1 R16.1 U1.71 | length 1738.2
  Bottom Layer w10: U1.71 673.46,548.46 673.46,751.64 693.46,771.64 693.46,843.36 756.48,906.37 756.48,1087.19 801.39,1132.11 1345.86,1132.11 1429.53,1048.44 1429.53,1022.5 1466.56,985.47 1503.44,985.47 1529.53,1011.56 R16.1@1529.53,1103.94 ; R16.1 1529.53,1109.84 R16.1@1529.53,1103.94 ; Q2.1 1634.96,1096.41 1537.06,1096.41 R16.1@1529.53,1103.94
IN1_AC: Q3.1 R17.2 U1.59 | length 1499.6
  Top Layer w10: v1(1041,1716) 1041,1900 1048.63,1907.63 1048.63,1913.54 1020.76,1941.41 1011.94,1950.2 1011.94,2030.4 1142.45,2160.9 1178.27,2160.9 1210.17,2192.8 Q3.1
  Bottom Layer w10: U1.59 713.46,1188.46 713.46,1535.07 795.34,1616.94 969.72,1616.94 1041,1688.23 v1(1041,1716)
IN2: J_IN.2 JP2.1 P4.3 | length 991
  Top Layer w10: P4.3 1145.04,2668.39 1145.04,2844.09 1225,2924.05 1225,3089.78 1232.37,3097.15 1293.15,3097.15 JP2.1
  Bottom Layer w10: J_IN.2@973.03,3089.78 J_IN.2@1225,3089.78
IN2_AA: Q4.1 R27.1 U1.52 | length 668.4
  Top Layer w10: U1.52 574,1451 697.74,1451 R27.1@711,1437.74 ; R27.1 R27.1@711,1437.74 ; Q4.1 711,1001.16 R27.1@711,1437.74
IN2_AC: Q5.1 R28.1 U1.61 | length 1487.8
  Top Layer w10: v1(1091,1751) 1090.68,1751.32 1090.68,1939.43 1048.63,1981.49 1048.63,1987.91 1121.13,2060.4 Q5.1
  Bottom Layer w10: U1.61 676.48,1051.48 676.48,1123.19 733.46,1180.18 733.46,1526.79 803.62,1596.94 978,1596.94 1091,1709.94 v1(1091,1751)
LCS1: LCD.12 U3.18 | length 725.2
  Top Layer w10: v1(2457,1816) 2423.5,1849.5 2423.5,1934.38 2477,1987.88 2477,2084.76 2497.24,2105 U3.18
  Bottom Layer w10: v1(2457,1816) 2639,1816 2735.75,1719.25 LCD.12@2735.75,1700
LCS2: LCD.13 U3.16 | length 494.7
  Top Layer w10: v1(2459,1913) 2459,1941.6 2522.4,2005 U3.16
  Bottom Layer w10: v1(2459,1913) 2642.2,1913 2684.5,1870.7 2684.5,1850.41 2734.91,1800 LCD.13
LDB0: LCD.4 U2.2 | length 356.1
  Top Layer w10: LCD.4 2703.66,944.53 2703.66,1008.82 U2.2@2582.24,1130.24 ; U2.2@2582.24,1130.24 U2.2 U2.2@2582.24,1130.24
LDB1: LCD.5 U2.3 | length 343.6
  Top Layer w10: U2.3@2582.24,1180.24 U2.3@2578.03,1180.24 ; LCD.5@2738.8,1023.68 LCD.5@2738.8,1019.46 ; LCD.5@2748.19,987.56 2738.8,996.95 LCD.5@2738.8,1019.46 ; LCD.5 2748.19,1010.07 LCD.5@2738.8,1019.46 ; U2.3@2578.03,1180.24 LCD.5@2738.8,1019.46 ; U2.3@2578.03,1180.24 U2.3 U2.3@2578.03,1180.24
LDB2: LCD.6 U2.4 | length 248.4
  Top Layer w10: U2.4 2617.95,1230.24 LCD.6
LDB3: LCD.7 U2.5 | length 227.7
  Top Layer w10: U2.5 2667.95,1280.24 LCD.7
LDB4: LCD.8 U2.6 | length 207
  Top Layer w10: U2.6 2715.45,1330.24 2745.69,1300 LCD.8
LDB5: LCD.9 U2.7 | length 202.7
  Top Layer w10: U2.7 2715.15,1380.24 2734.91,1400 LCD.9
LDB6: LCD.10 U2.8 | length 223.4
  Top Layer w10: U2.8 2678.43,1430.24 LCD.10
LDB7: LCD.11 U2.9 | length 244.1
  Top Layer w10: U2.9 2628.43,1480.24 LCD.11
LDI: LCD.16 U3.12 | length 433.7
  Top Layer w10: U3.12 2648.2,1805 2690.5,1847.3 2690.5,2042.31 LCD.16
LE: LCD.17 U3.14 | length 381
  Top Layer w10: U3.14 2579.49,1905 2607.28,1932.8 2607.28,2022.07 2740.69,2155.47 2740.69,2180.06 LCD.17@2748.19,2187.56
LED_G: U1.63 U3.11 | length 3489
  Top Layer w10: v1(2469,1119) 2497,1147 2497,1541.39 2550.94,1595.33 U3.11
  Bottom Layer w10: U1.63 696.48,971.48 696.48,1113.48 753.46,1170.46 753.46,1518.5 811.9,1576.94 986.29,1576.94 1178.34,1769 1910.27,1769 2221.5,1457.77 2221.5,1432.57 2267,1387.07 2267,1311.8 2459.8,1119 v1(2469,1119)
LED_GREEN: R46.2 U3.9 | length 2197.3
  Top Layer w10: R46.2@321,1854 328,1847 v1(391,1847) ; U3.9 2197.6,1805 2232.66,1769.94 2253.07,1769.94 v1(2259,1764.01)
  Bottom Layer w10: v1(391,1847) 392.46,1848.46 489.39,1751.54 760.22,1751.54 897.69,1889 2134.01,1889 v1(2259,1764.01)
LED_R: U1.43 U3.13 | length 2179.2
  Top Layer w10: U3.13 2579.49,1855 2580.49,1856 v1(2649,1856)
  Bottom Layer w10: U1.43 625.63,1900.63 748.43,1900.63 776.8,1929 2178.28,1929 2268.78,1838.5 2362.58,1838.5 2380.08,1856 v1(2649,1856)
LED_RED: R47.2 U3.7 | length 2374.1
  Top Layer w10: R47.2 335.69,2189.06 379.56,2189.06 386.61,2182 v1(395,2182) ; U3.7 2244.8,1905 2291.3,1858.5 2320.7,1858.5 2341.5,1879.3 2341.5,1911.5 v1(2276,1977)
  Bottom Layer w10: v1(395,2182) 482.8,2182 496.33,2168.46 644.68,2168.46 824.14,1989 2203.13,1989 2215.13,1977 v1(2276,1977)
LRST: LCD.14 R10.2 U3.3 | length 1014
  Top Layer w10: U3.3 2199.91,2105 2199.91,2108.22 2228.19,2136.5 2410.5,2136.5 2437,2110 2437,2031 v1(2405,1999) ; R10.2 2655.91,1737.56 2670.59,1752.24 2670.59,1785.37 2740.69,1855.47 2740.69,1892.5 LCD.14
  Bottom Layer w10: v1(2405,1999) 2409.36,1999 2431.36,1977 2658.75,1977 LCD.14@2748.19,1887.56
LRW: LCD.15 U3.5 | length 650.8
  Top Layer w10: U3.5 2200.8,2005 2284.8,2089 v1(2398,2089)
  Bottom Layer w10: v1(2398,2089) 2487,2000 LCD.15
NetB1_1: B1.1 B1.2 R38.1 R42.2 | length 421.4
  Top Layer w10: B1.1 3214.5,397.78 3214.5,453.24 3160.26,507.48 3160.26,591.26 3214.5,645.5 3214.5,712.22 B1.2
NetB2_1: B2.1 B2.2 R39.1 R43.2 | length 494.6
  Top Layer w10: R43.2 R39.1 3190,998.74 ; B2.1 3214.5,862.15 3214.5,974.24 3190,998.74 ; B2.2 3214,1176.09 3214,1022.74 3190,998.74
NetB3_1: B3.1 B3.2 R40.1 R44.2 | length 434
  Top Layer w10: B3.1 3214,1327.65 3214,1384.74 3145,1453.74 3145,1520 3214.5,1589.5 3214.5,1641.59 B3.2
NetB4_1: B4.1 B4.2 R41.1 R45.2 | length 434.7
  Top Layer w10: B4.1 3214.5,1787.15 3214.5,1852.5 3158.26,1908.74 3150,1908.74 3150,1974 3214,2038 3214,2101.09 B4.2
NetC4_2: C4.2 R23.2 U5.5 | length 209.6
  Top Layer w10: U5.5 1721,1625 C4.2@1725,1621 ; R23.2 1733,1551.37 C4.2
NetC5_1: C5.1 P2.2 | length 131.4
  Bottom Layer w10: P2.2 1870,2510 1869.37,2509.37 C5.1 C5.1@1886.42,2509.37
NetC5_2: C5.2 P2.9 | length 107.2
  Bottom Layer w10: P2.9 C5.2
NetC6_1: C6.1 R22.2 R23.1 | length 140.1
  Top Layer w10: R23.1 C6.1 1811.37,1411.13 R22.2
NetC6_2: C6.2 P1.9 U5.6 U5.7 | length 1189.8
  Top Layer w10: U5.7 1566.57,1725 1546,1704.43 1546,1694 1565,1675 U5.6 1745.49,1675 1767.69,1652.8 1767.69,1516.69 C6.2@1734.41,1483.41 ; v1(1640.98,1383) 1640.98,1385.71 1729.61,1474.33 1732.63,1474.33 C6.2 C6.2@1747.32,1465.55
  Bottom Layer w10: v1(1640.98,1383) 1575.03,1383 1529.53,1337.5 1529.53,1177.91 1573.72,1133.71 1655.29,1133.71 1685,1104 P1.9
NetC7_2: C7.2 R34.2 U5.12 | length 180.5
  Top Layer w10: C7.2 R34.2 1277,1559.56 1291.69,1544.87 1326.22,1544.87 1346.09,1525 U5.12
NetC8_1: C8.1 P4.2 | length 114.1
  Bottom Layer w10: C8.1 P4.2
NetC8_2: C8.2 P4.9 | length 107.2
  Bottom Layer w10: P4.9 C8.2
NetC9_1: C9.1 R33.2 R34.1 | length 143.9
  Top Layer w10: R34.1 1209.41,1554.31 1209.41,1505.54 1225.11,1489.83 1281.46,1489.83 R33.2@1282,1490.37
NetC9_2: C9.2 P3.9 U5.13 U5.14 | length 826.3
  Top Layer w10: P3.9@842,1179.68 897.47,1235.15 1160.44,1235.15 1214.41,1289.11 1214.41,1411.04 1258.14,1454.77 1325.87,1454.77 1346.09,1475 U5.13 1387.43,1475 1407.29,1455.14 1407.29,1444.86 1387.43,1425 U5.14
NetC11_2: C11.2 ENC1.A R48.1 R49.2 | length 4428.8
  Top Layer w10: R48.1 R49.2 437.91,1633.37 452.59,1648.06 452.59,2124.41 496.64,2168.46 517.67,2168.46 542.5,2193.3 542.5,2261.5 v1(540,2264) ; ENC1.A 3269,2873.64 v1(3269,2760)
  Bottom Layer w10: v1(540,2264) 595.54,2208.46 661.32,2208.46 840.78,2029 2249.51,2029 2253.01,2032.5 2254.85,2032.5 2572.57,2350.22 2572.57,2352.06 2621.94,2401.43 2621.94,2608.06 2640.1,2626.22 2691.9,2626.22 2792.72,2525.4 2792.72,2482.08 2864.3,2410.5 2893.7,2410.5 2914.5,2431.3 2914.5,2493.47 3039.77,2618.74 3094.01,2618.74 3123.38,2648.11 3253.74,2648.11 C11.2 ; C11.2@3269,2662.8 v1(3269,2760)
NetC12_2: C12.2 ENC1.B R50.1 R52.2 | length 4532.8
  Top Layer w10: R50.1 383.69,1403.06 398.78,1403.06 R52.2@440.09,1444.37 ; R52.2 R52.2@440.09,1444.37 ; v1(608,2276.8) 608,2230.51 525.95,2148.46 504.93,2148.46 476.54,2120.07 476.54,1611.42 454.43,1589.32 400.2,1589.32 391.41,1580.53 391.41,1493.06 R52.2@440.09,1444.37 ; v1(3071.57,2749) ENC1.B
  Bottom Layer w10: v1(608,2276.8) 656.33,2228.46 669.6,2228.46 849.07,2049 2241.23,2049 2244.73,2052.5 2246.57,2052.5 2552.57,2358.51 2552.57,2513.22 2499.5,2566.3 2499.5,2694.7 2520.3,2715.5 2659.19,2715.5 2841,2533.69 2926.43,2533.69 3031.49,2638.74 3047.52,2638.74 C12.2 v1(3071.57,2749)
NetD1_2: D1.1 P1.10 Q2.3 | length 227.3
  Top Layer w10: P1.10 1890,1030 D1.1@1901,1041
  Bottom Layer w10: Q2.3@1757.32,1125.32 1785,1097.64 P1.10
NetD2_2: D2.1 P2.10 Q3.3 | length 925
  Top Layer w10: Q3.3 1635.37,2155.4 1674.53,2194.56 1674.53,2264.98 1714.53,2304.98 1714.53,2330.92 1751.56,2367.95 1888.44,2367.95 1925.47,2330.92 1962.5,2330.92 P2.10
  Bottom Layer w10: P2.10 1983.27,2323.43 2005.85,2346 2016,2346 D2.1
NetD3_2: D3.1 P3.10 Q4.3 | length 222.9
  Top Layer w10: Q4.3@806,966.8 813.8,959 Q4.3 831.07,959 840.47,968.4 P3.10
  Bottom Layer w10: P3.10 D3.1
NetD4_2: D4.1 P4.10 Q5.3 | length 516
  Top Layer w10: Q5.3@1304.21,2022.6 1299.82,2022.6 1286.87,2035.55 1286.87,2257.32 1352.97,2323.43 P4.10
  Bottom Layer w10: P4.10 1399.39,2332.81 1422.81,2332.81 D4.1 D4.1@1456.57,2390
NetD5_A: D5.A R46.1 | length 64.3
  Top Layer w10: R46.1 D5.A@321,1988
NetD6_A: D6.A R47.1 | length 62
  Top Layer w10: D6.A@321,2063 R47.1
NetD8_2: D8.1 D9.2 P2.8 R20.2 R24.1 U5.3 | length 1418.5
  Top Layer w10: U5.3 1534.2,1525 1436.98,1622.22 1436.98,2086.98 1485.4,2135.4 1643.65,2135.4 1709.37,2201.12 1709.37,2231 R20.2 ; R20.2@1709.37,2237.8 1709.37,2262.8 P2.8
  Bottom Layer w10: P2.8 1770,2397.12 1838.2,2465.32 1968.06,2465.32 R24.1
NetD10_2: D10.1 D11.2 P4.8 R25.1 R26.2 U5.10 | length 1194.1
  Top Layer w10: P4.8@1180.61,2314.04 P4.8 1264.38,2249.05 1264.38,2007.72 D11.2 ; U5.10 1387.43,1625 1415.23,1652.8 1415.23,1742.77 1366.76,1791.24 D11.2@1366.76,1900.31
  Bottom Layer w10: R26.2 1187.12,2400 1190,2397.12 ; P4.8 1190,2397.12 ; R25.1 1259.51,2466.63 1190,2397.12
NetENC1_E: ENC1.E R51.1 R53.2 | length 4777.3
  Top Layer w10: R51.1 448,848.37 448,1108.95 437.19,1119.76 R53.2 452.69,1134.45 490.91,1134.45 508,1151.54 545.07,1151.54 573.46,1179.93 573.46,1220.07 542,1251.54 493.58,1251.54 400.8,1344.32 336.57,1344.32 318.41,1362.47 318.41,1659.27 336.57,1677.43 390.8,1677.43 428.24,1714.86 428.24,2129.24 v1(507,2208) ; v1(3007.83,2459) 3007.83,2383.17 3071.57,2319.43 ENC1.E
  Bottom Layer w10: v1(507,2208) 526.54,2188.46 653.04,2188.46 832.5,2009 2257.8,2009 2261.3,2012.5 2263.14,2012.5 2695.16,2444.53 2795.47,2444.53 2849.5,2390.5 2939.33,2390.5 v1(3007.83,2459)
NetF1_1: F1.1 J2.1 | length 277.2
  Top Layer w80: J2.1@525,2778.15 544.13,2759.02 675.43,2759.02 F1.1@759.49,2674.96
NetJ_OUT_1: J_OUT.1 JP2.2 R32.1 | length 911.4
  Top Layer w10: JP2.2 1893.38,3203 1978.15,3118.23 1978.15,2950.22 R32.1 1977.31,2921.68 1961.28,2921.68 1903.75,2864.15 1903.75,2780.6 J_OUT.1
NetJ_OUT_2: J_OUT.2 R35.1 | length 1179.2
  Top Layer w10: J_OUT.2@1910,3090 1910,2898.69 1830.04,2818.73 1830.04,2746.81 1869.96,2706.89 1995.09,2706.89 2026,2675.98 2026,2598.5 2064.2,2560.3 2233.94,2560.3 2248.63,2545.61 R35.1
  Bottom Layer w10: J_OUT.2@1658.03,3090 J_OUT.2@1910,3090
NetJP1_1: BODE.1 R32.2 U6.8 U6.9 | length 1157.2
  Top Layer w10: R32.2@1992,2854.63 2001.96,2854.63 2079,2777.59 v1(2079,2750) ; U6.8 2084,2649.43 2079,2644.43 2079,2708.65 v1(2079,2750) ; U6.9 2134,2695 v1(2079,2750)
  Bottom Layer w10: BODE.1 1761.87,2829.13 1802.38,2829.13 1816.43,2843.19 1986.02,2843.19 2079,2750.2 v1(2079,2750)
NetP1_2: P1.2 R22.1 | length 100.8
  Top Layer w10: P1.2 1685,1363.24 R22.1
NetP1_3: P1.3 U5.1 U5.2 | length 183.2
  Top Layer w10: U5.2@1568.74,1475 1548,1454.26 1548,1443 1566,1425 U5.1 1585,1422.76 P1.3
NetP1_4: P1.4 P1.7 | length 300
  Bottom Layer w10: P1.7 P1.4
NetP1_8: P1.8 R18.2 | length 962.7
  Top Layer w10: P1.8 1629.53,985.47 2167.95,985.47 2285.43,868 R18.2
NetP2_4: P2.4 P2.7 | length 300
  Bottom Layer w10: P2.7 P2.4
NetP3_2: P3.2 R33.1 | length 291.4
  Top Layer w10: P3.2@1142,1179.68 1271.17,1308.84 1271.17,1411.63 R33.1@1277.07,1411.63
NetP3_3: P3.3 U5.8 U5.9 | length 718
  Top Layer w10: P3.3 1140.47,1318.71 1095.95,1363.23 1095.95,1500.12 1163,1567.17 1163,1667.23 1192.36,1696.59 1320.29,1696.59 1323,1693.88 ; U5.9 1341.88,1675 1323,1693.88 ; U5.8 1346.09,1725 1323,1701.91 1323,1693.88
NetP3_4: P3.4 P3.7 | length 300
  Bottom Layer w10: P3.7 P3.4
NetP3_8: P3.8 R29.2 | length 2373.2
  Top Layer w10: P3.8@833.9,1275.1 761.47,1202.67 761.47,960.14 790.41,931.2 850.08,931.2 884.35,965.47 2159.67,965.47 2460.51,664.63 R29.2
NetP4_4: P4.4 P4.7 | length 300
  Bottom Layer w10: P4.7 P4.4
NetQ1_2: Q1.3 R12.1 R13.1 | length 155.6
  Bottom Layer w10: Q1.3 2586.57,2586.32 R13.1 R12.1
NetR1_1: R1.1 U2.18 | length 257.3
  Top Layer w10: U2.18 2195.76,1180.24 v1(2265,1111)
  Bottom Layer w10: R1.1 2245.91,989.37 2265,1008.46 v1(2265,1111)
NetR2_1: R2.1 U2.17 | length 340.9
  Top Layer w10: U2.17 2204.06,1230.24 2286.3,1148 v1(2313,1148)
  Bottom Layer w10: v1(2313,1148) 2313,999.37 R2.1@2330,999.37
NetR3_1: R3.1 U2.16 | length 433.9
  Top Layer w10: U2.16 2218.76,1280.24 v1(2274,1225)
  Bottom Layer w10: v1(2274,1225) 2278.86,1229.86 2281.63,1229.86 2400.5,1110.99 2400.5,999.37 R3.1@2420,999.37
NetR4_1: R4.1 U2.15 | length 560.7
  Top Layer w10: U2.15 2174.79,1327.25 2301.75,1327.25 v1(2305,1324)
  Bottom Layer w10: v1(2305,1324) 2314.2,1324 2510,1128.2 R4.1
NetR5_1: R5.1 U2.14 | length 1647.8
  Top Layer w10: U2.14 2200.54,1380.24 v1(2278.07,1457.76)
  Bottom Layer w10: R5.1@943,1739.37 957.91,1754.28 966.79,1754.28 1021.5,1809 1926.84,1809 v1(2278.07,1457.76)
NetR6_1: R6.1 U2.13 | length 2082.7
  Top Layer w10: U2.13 2200.35,1430.24 2242.57,1472.46 2321,1550.9 v1(2321,1688)
  Bottom Layer w10: R6.1@715.32,1710.32 734.12,1729.12 766.09,1729.12 905.97,1869 2103.81,1869 2284.81,1688 v1(2321,1688)
NetR7_1: R7.1 U2.12 | length 2068.3
  Top Layer w10: U2.12 2200.35,1480.24 2275,1554.88 v1(2275,1606)
  Bottom Layer w10: R7.1@740,1861.26 740,1879.94 756.03,1879.94 785.09,1909 2169.99,1909 2356.5,1722.49 2356.5,1673.3 2289.2,1606 v1(2275,1606)
NetR8_1: R8.1 U2.11 | length 1505.4
  Top Layer w10: v1(2131,1664) 2171.81,1623.19 U2.11
  Bottom Layer w10: R8.1@877.46,1749.83 891,1763.37 904,1763.37 969.63,1829 1966,1829 v1(2131,1664)
NetR11_1: LCD.18 R11.1 | length 957.1
  Top Layer w10: LCD.18@2748.19,2287.56 2810,2349.37 2810,2668.04 2869.25,2727.29 2869.25,3083.68 2936.5,3150.94 R11.1
NetR11_2: LCD.3 R11.2 | length 2972.3
  Top Layer w10: LCD.3 2853.28,800 2901.75,751.54 2945.07,751.54 2973.46,779.93 2973.46,820.07 2943.54,850 2906.46,850 2856.54,899.93 2856.54,1800.07 2904.93,1848.46 2942,1848.46 2973.46,1879.93 2973.46,2120.07 2945.07,2148.46 2895.46,2148.46 2830,2213.93 2830,2659.76 2889.25,2719.01 2889.25,2967.04 2942.01,3019.8 3012.06,3019.8 3099.89,3107.63 R11.2
NetR11_3: R11.3 R14.2 | length 421.3
  Top Layer w10: R11.3 2968,3064.32 3023.42,3119.74 3023.42,3131.11 3054.31,3162 3157.28,3162 3166.07,3153.21 3166.07,3015.3 R14.2
NetR12_2: LCD.20 R12.2 R13.2 | length 167.5
  Bottom Layer w10: R13.2 R12.2 R12.2@2666.63,2500
  Bottom Layer w20: R12.2@2666.63,2500 LCD.20
NetR19_1: R19.1 R21.2 | length 81.4
  Top Layer w10: R21.2 2482.63,711 R19.1
NetR30_1: R30.1 R31.2 | length 82.8
  Top Layer w10: R31.2 2617.06,941.31 2617.06,906.41 2632.09,891.37 R30.1
NetR35_2: R35.2 U6.13 U6.14 | length 184.9
  Top Layer w10: R35.2 2327.37,2547.91 R35.2@2334,2554.54 ; U6.13 R35.2@2334,2554.54 ; U6.14 2384,2604.3 2334,2554.3 R35.2@2334,2554.54
NetR54_1: R54.1 R60.2 U6.3 U6.5 | length 425.6
  Top Layer w10: R60.2 R54.1 R54.1 2143.63,3012.19 2184,2971.82 U6.5 2184,2828.57 2211.8,2800.77 2256.2,2800.77 2284,2828.57 U6.3
NetU6_1: U6.1 U6.2 | length 107.8
  Top Layer w10: U6.2 2334,2828.57 2353.86,2808.71 2364.14,2808.71 2384,2828.57 U6.1
NetU6_6: U6.6 U6.7 | length 111.4
  Top Layer w10: U6.7 2084,2828.57 2105.57,2807 2116.14,2807 2134,2824.86 U6.6
ROT_ENC_A: R49.1 U1.51 | length 211.6
  Top Layer w10: R49.1@436,1554.63 442.17,1548.46 576.54,1548.46 U1.51
ROT_ENC_B: R52.1 U1.53 | length 204.9
  Top Layer w10: R52.1 460.09,1351.54 576.54,1351.54 U1.53
pads on no net: ENC1. U1.4 U1.5 U1.7 U1.9 U1.10 U1.11 U1.12 U1.13 U1.14 U1.15 U1.16 U1.17 U1.18 U1.23 U1.24 U1.25 U1.26 U1.27 U1.29 U1.31 U1.33 U1.34 U1.45 U1.46 U1.48 U1.50 U1.54 U1.56 U1.60 U1.62 U1.69 U1.73 U1.74 U1.75 U1.76
copper on no net:
  other v2: 1099.02,2873.24 1784.02,2873.46 1099.02,3148.83 1784.02,3149.06
  other v3: 779.68,170.87 2767.87,170.87 779.68,2926.77 2767.87,2926.77
  other v4: 3170,2575

## Polygon pours and split planes (outlines as drawn)
GND on Bottom Layer "GND_L02_P002" (solid, remove dead copper, pour order 2): 0,3300 3550,3300 3550,0 0,0
no net on Bottom Layer "Bottom Layer-No Net" (solid, pour order 0): 1870,140
+5 on Top Layer "+5_L01_P004" (solid, remove dead copper, pour order 4): 0,3300 3550,3300 3550,0 0,0

## Keep-outs
Keep-Out Layer:
  the board outline again, w78.74

## Other copper
Top Layer:
  text "Karz Gergely" at 1451,92 h60
Bottom Layer:
  text "Karz Gergely" at 1451,142 h60 r180

## Silkscreen, mask and mechanical layers (free items; w line width, h text height)
Top Solder:
  the board outline again, w10

## Text inside footprints (layer, text, board x,y; h text height)
U1: Bottom Overlay "CN7" at 3086,2174 h32; Bottom Overlay "CN10" at 675,2170 h32